# EAGLE board or-clock_display (EAGLE 6.5.0)
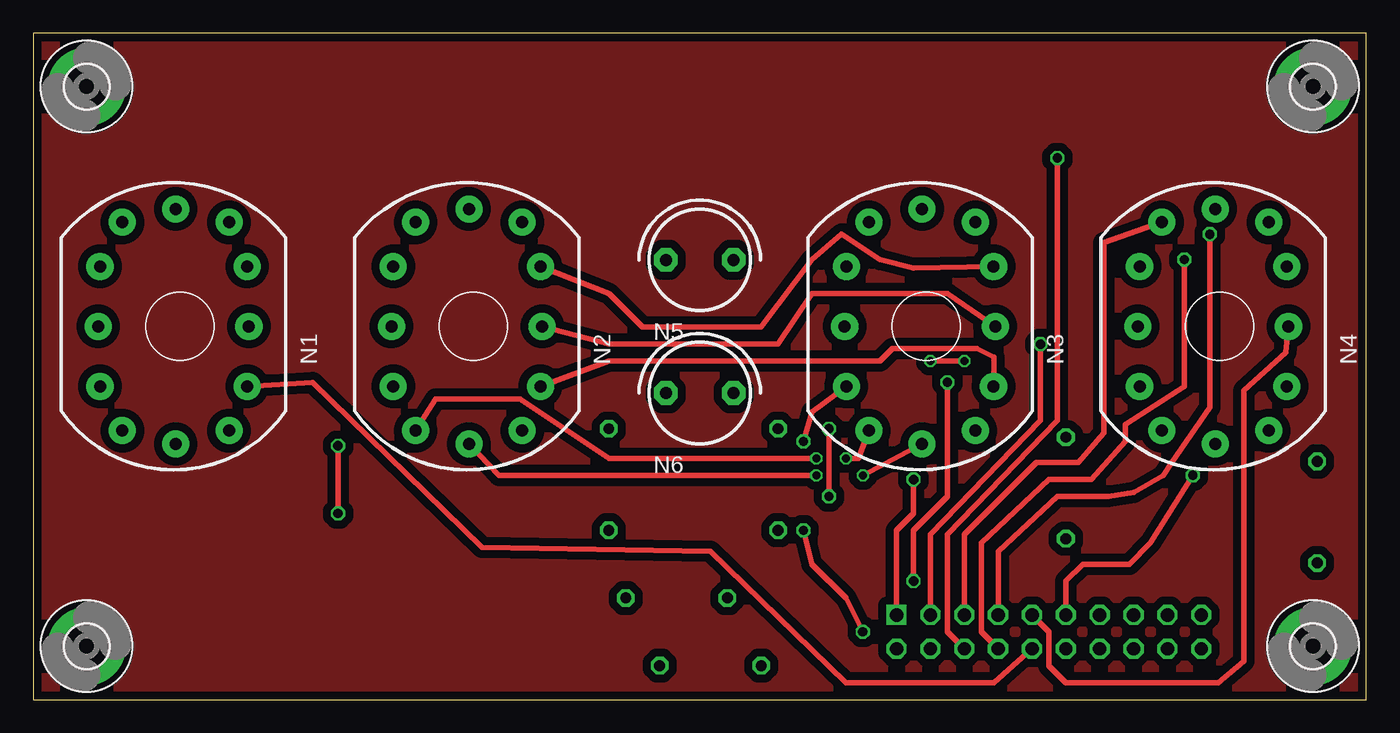
[diagram p0: board, top side]
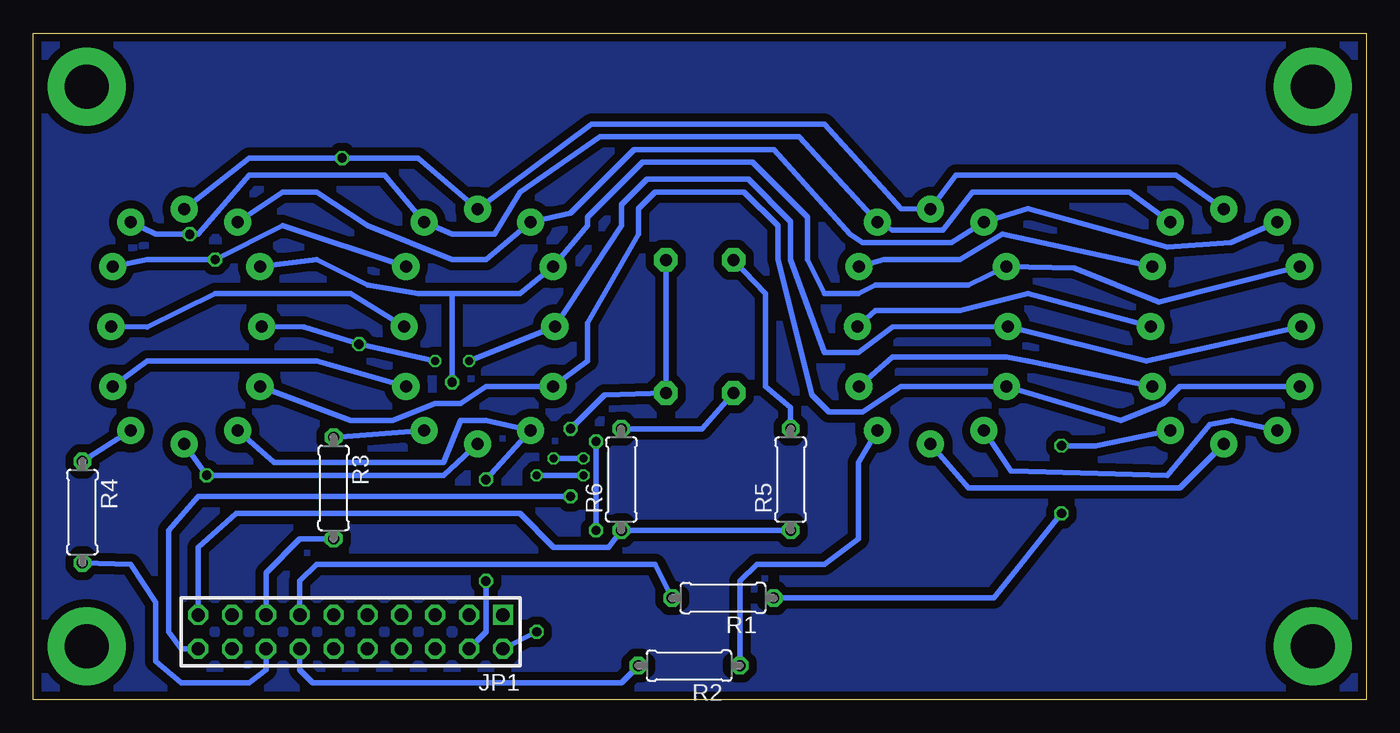
[diagram p1: board, bottom side, seen from below]

Size 100 x 50 mm. Coordinates in mm from the lower left corner, seen from the top.
Outline: 0,0 100,0 100,50 0,50 0,0
Copper layers (1*16): Top 0.035mm / dielectric 1.5mm / Bottom 0.035mm
Design rules "SeeedStudio_2layer_DRU_no_angle_20140221": minimum track width 6mil, minimum drill 12mil, track to track 6mil, track to pad 6mil, pad to pad 6mil, via to via 6mil, smd to smd 0mil, copper to edge 10mil, drill to drill 10mil, minimum pad ring 10mil, minimum via ring 6mil, stop-mask expansion 2mil, vias tented up to drill 100mil, thermal gap 10mil

## Footprints (pad centres in the part's own frame; a part is rotated, then mirrored left to right if it is on the bottom)
3,3-PAD = drill 3.3 pad 5.842: B3,3 0,0
2X10 = drill 1 square: 1 -11.43,-1.27 | drill 1 octagon: 2 -11.43,1.27; 3 -8.89,-1.27; 4 -8.89,1.27; 5 -6.35,-1.27; 6 -6.35,1.27; 7 -3.81,-1.27; 8 -3.81,1.27; 9 -1.27,-1.27; 10 -1.27,1.27; 11 1.27,-1.27; 12 1.27,1.27; 13 3.81,-1.27; 14 3.81,1.27; 15 6.35,-1.27; 16 6.35,1.27; 17 8.89,-1.27; 18 8.89,1.27; 19 11.43,-1.27; 20 11.43,1.27
IN-12 = drill 0.9 pad 2.032: 0 5.048,-4.5; 1 -4.317,-7.817; 2 -6,-4.5; 3 -6.127,0; 4 -6,4.5; 5 -4.317,7.817; 6 -0.318,8.818; 7 3.683,7.817; 8 5.048,4.5; 9 5.175,0; A 3.683,-7.817; LHDP -0.318,-8.818
INS-1 = drill 0.9 pad 1.778 octagon: A -2.54,0; K 2.54,0
0207/7 = drill 0.813 octagon: 1 -3.81,0; 2 3.81,0

## Placement (x,y rotation side)
H1  MOUNT-PAD-ROUND3.3  [3,3-PAD]  96,46 0 top
H2  MOUNT-PAD-ROUND3.3  [3,3-PAD]  96,4 0 top
H3  MOUNT-PAD-ROUND3.3  [3,3-PAD]  4,4 0 top
H4  MOUNT-PAD-ROUND3.3  [3,3-PAD]  4,46 0 top
JP1  [2X10]  76.2,5.08 180 bottom
N1  IN-12B  [IN-12]  11,28 0 top
N2  IN-12B  [IN-12]  33,28 0 top
N3  IN-12B  [IN-12]  67,28 0 top
N4  IN-12B  [IN-12]  89,28 0 top
N5  INS-1  [INS-1]  50,33 0 top
N6  INS-1  [INS-1]  50,23 0 top
R1  33K  [0207/7]  48.26,7.62 180 bottom
R2  33K  [0207/7]  50.8,2.54 180 bottom
R3  33K  [0207/7]  77.47,15.88 270 bottom
R4  33K  [0207/7]  96.33,14.06 270 bottom
R5  1M  [0207/7]  43.18,16.51 90 bottom
R6  1M  [0207/7]  55.88,16.51 90 bottom

## Library data of the parts
H1-H4 N1-N6 R1-R6 = nixkit
JP1 = PIN_HEADERS_B

## Nets
A1: JP1.13 R1.2
A2: JP1.14 R2.2
A3: JP1.15 R3.2
A4: JP1.16 R4.2
D0: JP1.10 N1.0 N2.0 N3.0 N4.0
D1: JP1.1 N1.1 N2.1 N3.1 N4.1
D2: JP1.2 N1.2 N2.2 N3.2 N4.2
D3: JP1.3 N1.3 N2.3 N3.3 N4.3
D4: JP1.4 N1.4 N2.4 N3.4 N4.4
D5: JP1.5 N1.5 N2.5 N3.5 N4.5
D6: JP1.6 N1.6 N2.6 N3.6 N4.6
D7: JP1.7 N1.7 N2.7 N3.7 N4.7
D8: JP1.8 N1.8 N2.8 N3.8 N4.8
D9: JP1.9 N1.9 N2.9 N3.9 N4.9
DP: JP1.11 N1.LHDP N2.LHDP N3.LHDP N4.LHDP
N$1: N1.A R1.1
N$2: N2.A R2.1
N$3: N3.A R3.1
N$4: N4.A R4.1
N$5: N5.A R5.2
N$6: N6.A R6.2
SEP_ANODES: JP1.19 R5.1 R6.1
SEP_KATHODES: JP1.20 N5.K N6.K

## Tracks (layer width: path | path; a pad name or v marks a point on that pad's centre or on a via)
A1
  Bottom 0.406: R1.2 53.34,10.16 78.74,10.16 80.01,8.89 JP1.13
A2
  Bottom 0.406: R2.2 55.88,1.27 79.06,1.27 80.01,2.22 JP1.14
A3
  Bottom 0.406: JP1.15 82.55,9.53 80.01,12.06 R3.2
A4
  Bottom 0.406: JP1.16 82.55,2.22 83.82,1.27 88.9,1.27 90.81,2.86 90.81,7.3 92.71,10.16 R4.2
D0
  Top 0.406: N2.0 43.18,25.4 63.5,25.4 64.45,26.35 70.8,26.35 72.07,25.72 72.07,25.08 N3.0 | JP1.10 72.07,1.27 60.96,1.27 50.8,11.11 33.66,11.43 20.95,23.81 N1.0
  Bottom 0.406: N1.0 25.4,25.4 26.99,25.72 35.56,25.72 N2.0 | N3.0 78.74,25.4 91.44,25.4 N4.0
D1  (via drill 0.6, 0.7)
  Top 0.406: N2.1 30.16,22.54 36.51,22.54 43.18,18.1 v58.74,18.1 | v60.96,18.1 61.91,18.1 N3.1 | JP1.1 64.77,12.7 66.04,13.97 v66.04,16.51
  Bottom 0.406: N1.1 10.09,20.95 11.75,20.64 14.92,16.83 26.67,17.14 N2.1 | N4.1 81.92,17.78 69.22,17.78 67.94,20.95 66.04,20.95 N3.1 v66.04,16.51 | v58.74,18.1 v60.96,18.1
D2  (via drill 0.7)
  Top 0.406: v62.23,5.08 60.96,7.62 58.42,10.16 v57.78,12.7 | v57.78,19.37 58.42,21.59 N3.2
  Bottom 0.406: N1.2 13.97,23.5 15.24,22.23 18.41,20.95 N2.2 34.92,23.5 37.78,21.59 40.32,21.59 41.59,22.86 44.13,33.02 44.13,35.56 46.67,38.1 53.34,38.1 54.61,36.83 54.61,34.92 58.42,28.26 58.42,25.4 N3.2 66.04,23.5 67.94,22.23 69.85,22.23 73.03,20.95 76.2,20.95 N4.2 | JP1.2 v62.23,5.08 | v57.78,12.7 v57.78,19.37
D3  (via drill 0.6, 0.7)
  Top 0.406: v67.31,25.4 v69.85,25.4 | JP1.3 67.31,12.38 75.56,20.95 v75.56,26.67
  Bottom 0.406: N1.3 16.51,25.4 N2.3 35.56,27.94 38.1,26.04 40.64,26.04 43.18,33.02 43.18,35.88 46.35,39.05 53.98,39.05 55.88,37.15 55.88,35.56 N3.3 v67.31,25.4 | v69.85,25.4 v75.56,26.67 79.69,27.95 N4.3
D4  (via drill 0.7)
  Top 0.406: v66.04,8.89 66.04,12.7 68.58,15.24 v68.58,23.81
  Bottom 0.406: N1.4 15.56,29.84 21.91,32.38 N2.4 29.84,31.11 36.83,31.11 38.1,30.48 40.64,30.48 41.91,33.02 41.91,36.2 46.04,40.32 54.29,40.32 58.42,36.2 58.42,35.56 N3.4 63.5,30.48 68.58,30.48 | 68.58,30.48 71.12,30.48 74.93,31.11 78.74,33.02 N4.4 | JP1.4 66.04,5.08 v66.04,8.89 | v68.58,23.81 68.58,30.48
D5
  Top 0.406: JP1.5 69.85,12.38 75.25,17.78 78.42,17.78 80.33,20 80.33,34.29 N4.5
  Bottom 0.406: N1.5 10.16,34.29 14.92,33.97 25.4,36.83 N2.5 31.11,34.29 37.78,34.29 38.73,34.92 44.45,41.27 54.93,41.27 59.69,36.51 N3.5 66.04,33.02 68.58,33.02 74.93,35.56 78.74,38.1 81.28,38.1 N4.5
D6  (via drill 0.7)
  Top 0.406: JP1.6 68.58,5.08 68.58,12.38 76.83,20.95 v76.83,40.64
  Bottom 0.406: N1.6 14.29,39.37 30.8,39.37 N2.6 34.92,36.83 40.64,43.18 58.1,43.18 N3.6 71.12,40.64 v76.83,40.64 83.82,40.64 N4.6
D7  (via drill 0.7)
  Top 0.406: JP1.7 72.39,11.11 76.83,15.24 80.64,15.24 82.55,15.56 84.77,16.83 85.41,17.78 88.27,21.91 v88.27,34.92
  Bottom 0.406: N1.7 17.78,38.1 29.53,38.1 31.75,35.24 35.56,35.24 N2.7 42.55,42.23 57.47,42.23 63.5,38.1 65.41,34.92 68.58,34.92 N3.7 73.66,39.37 83.82,39.37 87.63,34.92 v88.27,34.92 90.81,34.92 N4.7
D8  (via drill 0.7)
  Top 0.406: N2.8 43.18,30.48 45.72,27.94 54.61,27.94 58.42,33.02 60.64,34.92 63.5,33.02 66.04,32.38 N3.8 | JP1.8 71.12,5.08 71.12,11.75 76.2,16.51 79.38,16.51 81.92,19.37 81.92,20.64 86.36,23.5 v86.36,33.02
  Bottom 0.406: N1.8 27.3,34.92 30.48,33.02 36.2,33.02 N2.8 | N3.8 81.28,35.56 v86.36,33.02 91.44,33.02 N4.8
D9
  Top 0.406: N2.9 43.18,26.67 55.88,26.67 58.42,30.48 68.58,30.48 N3.9 | JP1.9 76.2,5.08 76.2,2.54 77.47,1.27 88.9,1.27 90.81,2.86 90.81,23.18 93.98,26.04 N4.9
  Bottom 0.406: N1.9 25.4,30.48 30.48,29.21 36.83,29.21 N2.9 | N3.9 76.2,30.48 86.36,30.48 91.44,27.94 N4.9
DP  (via drill 0.6, 0.7)
  Top 0.406: N2.LHDP 34.92,16.83 v58.74,16.83 | v62.23,16.83 N3.LHDP | JP1.11 77.47,8.89 78.74,10.16 82.23,10.16 83.82,11.75 v87,16.83
  Bottom 0.406: N1.LHDP 13.97,15.88 29.84,15.88 N2.LHDP | N3.LHDP 69.22,16.83 v87,16.83 N4.LHDP | v58.74,16.83 v62.23,16.83
N$1  (via drill 0.7)
  Top 0.406: v22.86,13.97 v22.86,19.05
  Bottom 0.406: R1.1 27.94,7.62 v22.86,13.97 | v22.86,19.05 20.32,19.05 N1.A
N$2
  Bottom 0.406: R2.1 46.99,8.89 45.72,10.16 40.64,10.16 38.1,12.06 38.1,17.78 N2.A
N$3
  Bottom 0.406: R3.1 N3.A
N$4
  Bottom 0.406: R4.1 N4.A
N$5
  Bottom 0.406: R5.2 43.18,21.91 45.09,23.5 45.09,30.48 N5.A
N$6
  Bottom 0.406: R6.2 49.85,20.32 N6.A
N$7
  pour Bottom (isolate 0.61): 0,50.8 100.33,50.48 100.33,-0.32 0,0
N$8
  pour Top (isolate 0.61): 0,50.8 100.33,50.16 100.33,-0.64 0,0
SEP_ANODES
  Bottom 0.406: R5.1 R6.1 56.83,11.43 60.96,11.43 63.5,13.97 84.77,13.97 87.63,11.43 JP1.19
SEP_KATHODES  (via drill 0.7)
  Top 0.406: v59.69,15.24 v59.69,20.32
  Bottom 0.406: N5.K N6.K 57.15,22.86 v59.69,20.32 | JP1.20 88.9,3.81 89.85,5.08 89.85,12.7 87.63,15.24 v59.69,15.24